# Altium PCB CarrierBoard.PcbDoc (part 1 of 2)
Units mil, origin at the board's own origin, x right, y up, seen from the top; angles counter-clockwise.
Board outline 3784.29 x 4050 mil, 2 copper layers (Top Layer, Bottom Layer), stack 63 mil thick; 58 components, 54 nets, 251 pads, 77 vias.
Unrouted connection lines stored in the file: 2.
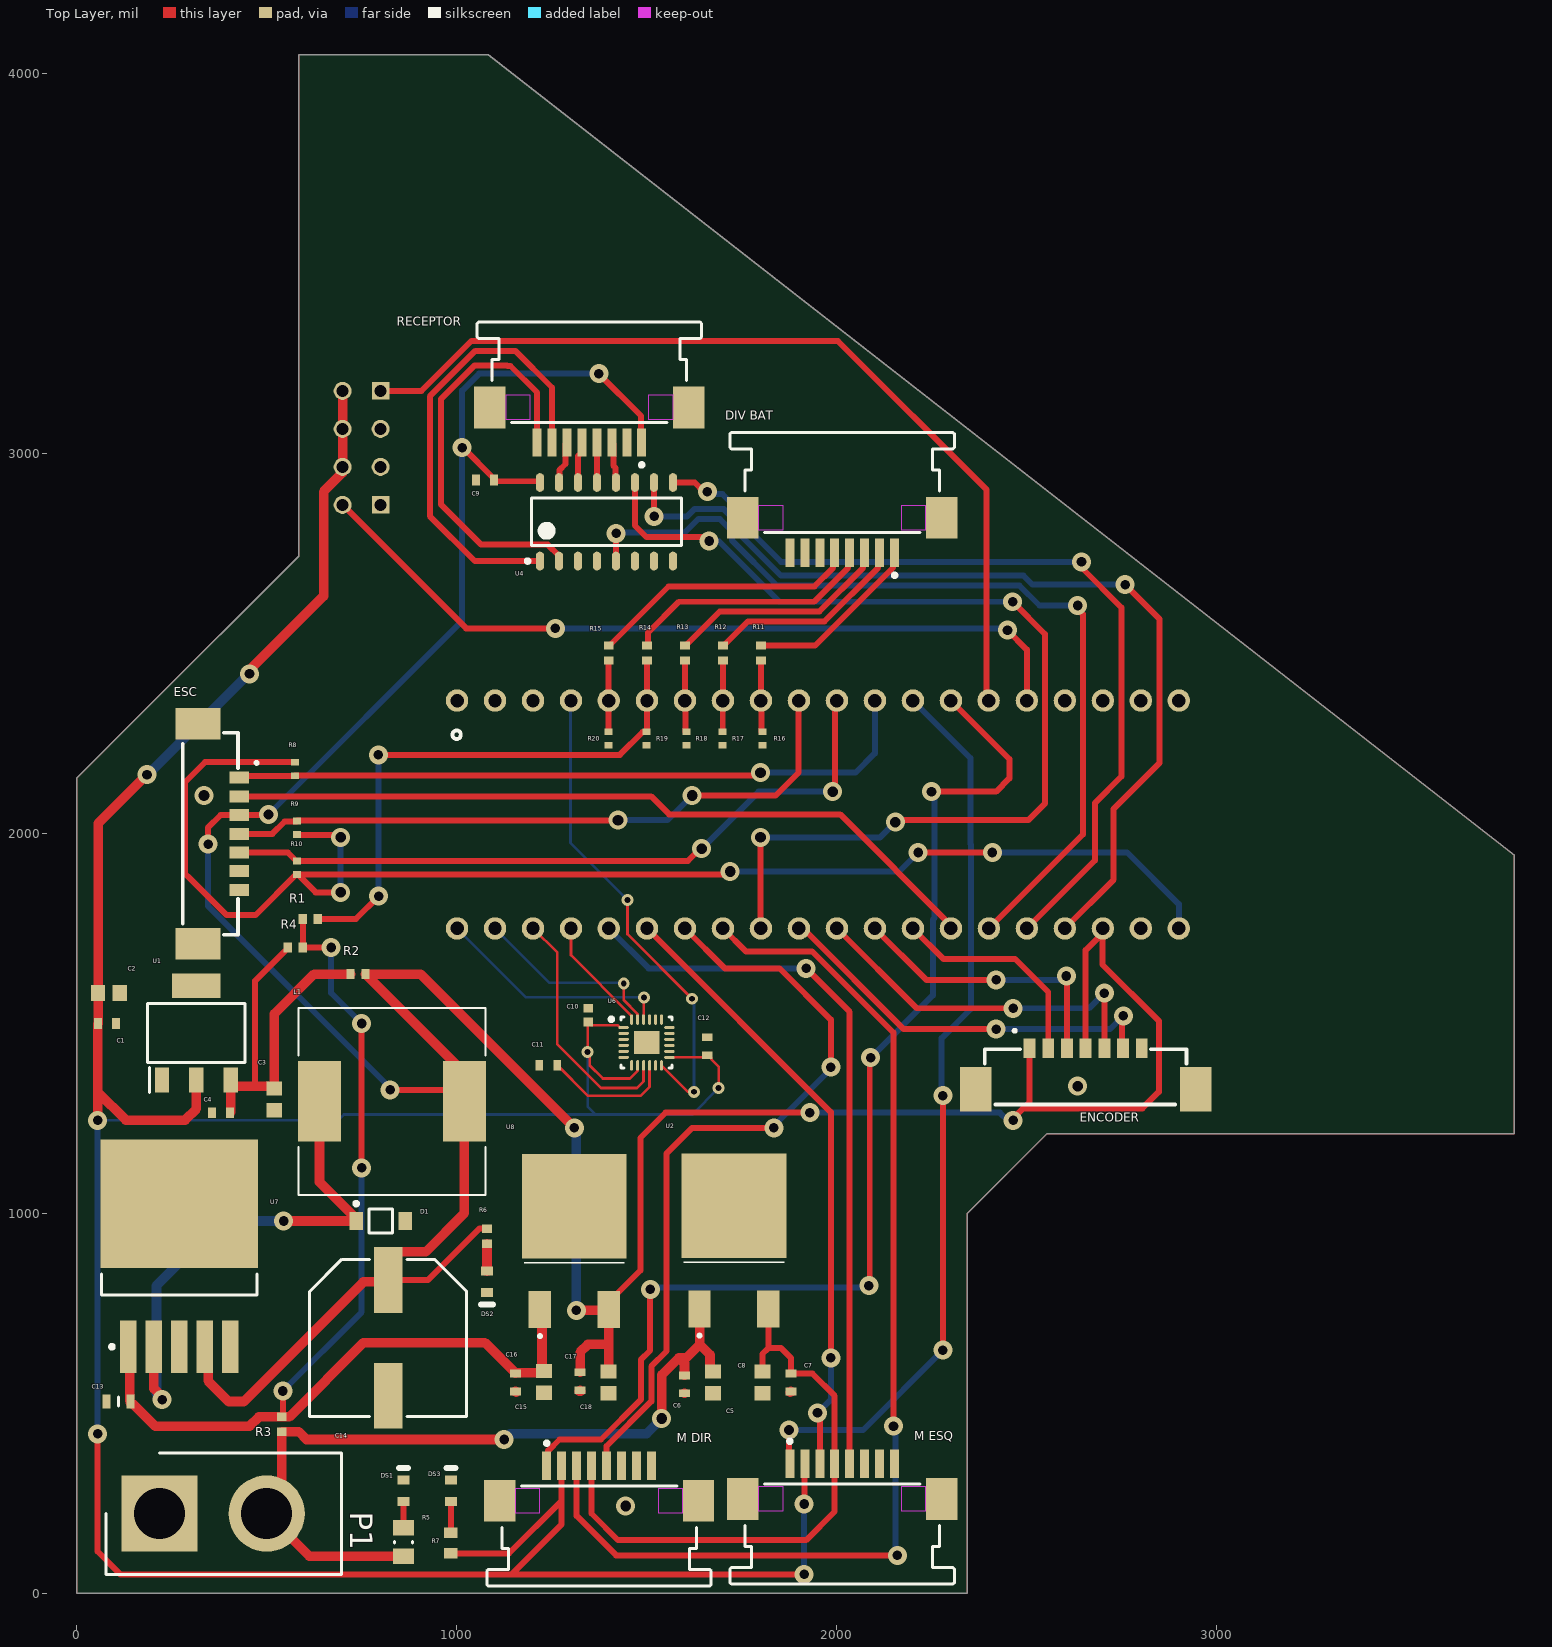
[diagram p0: Top Layer view]
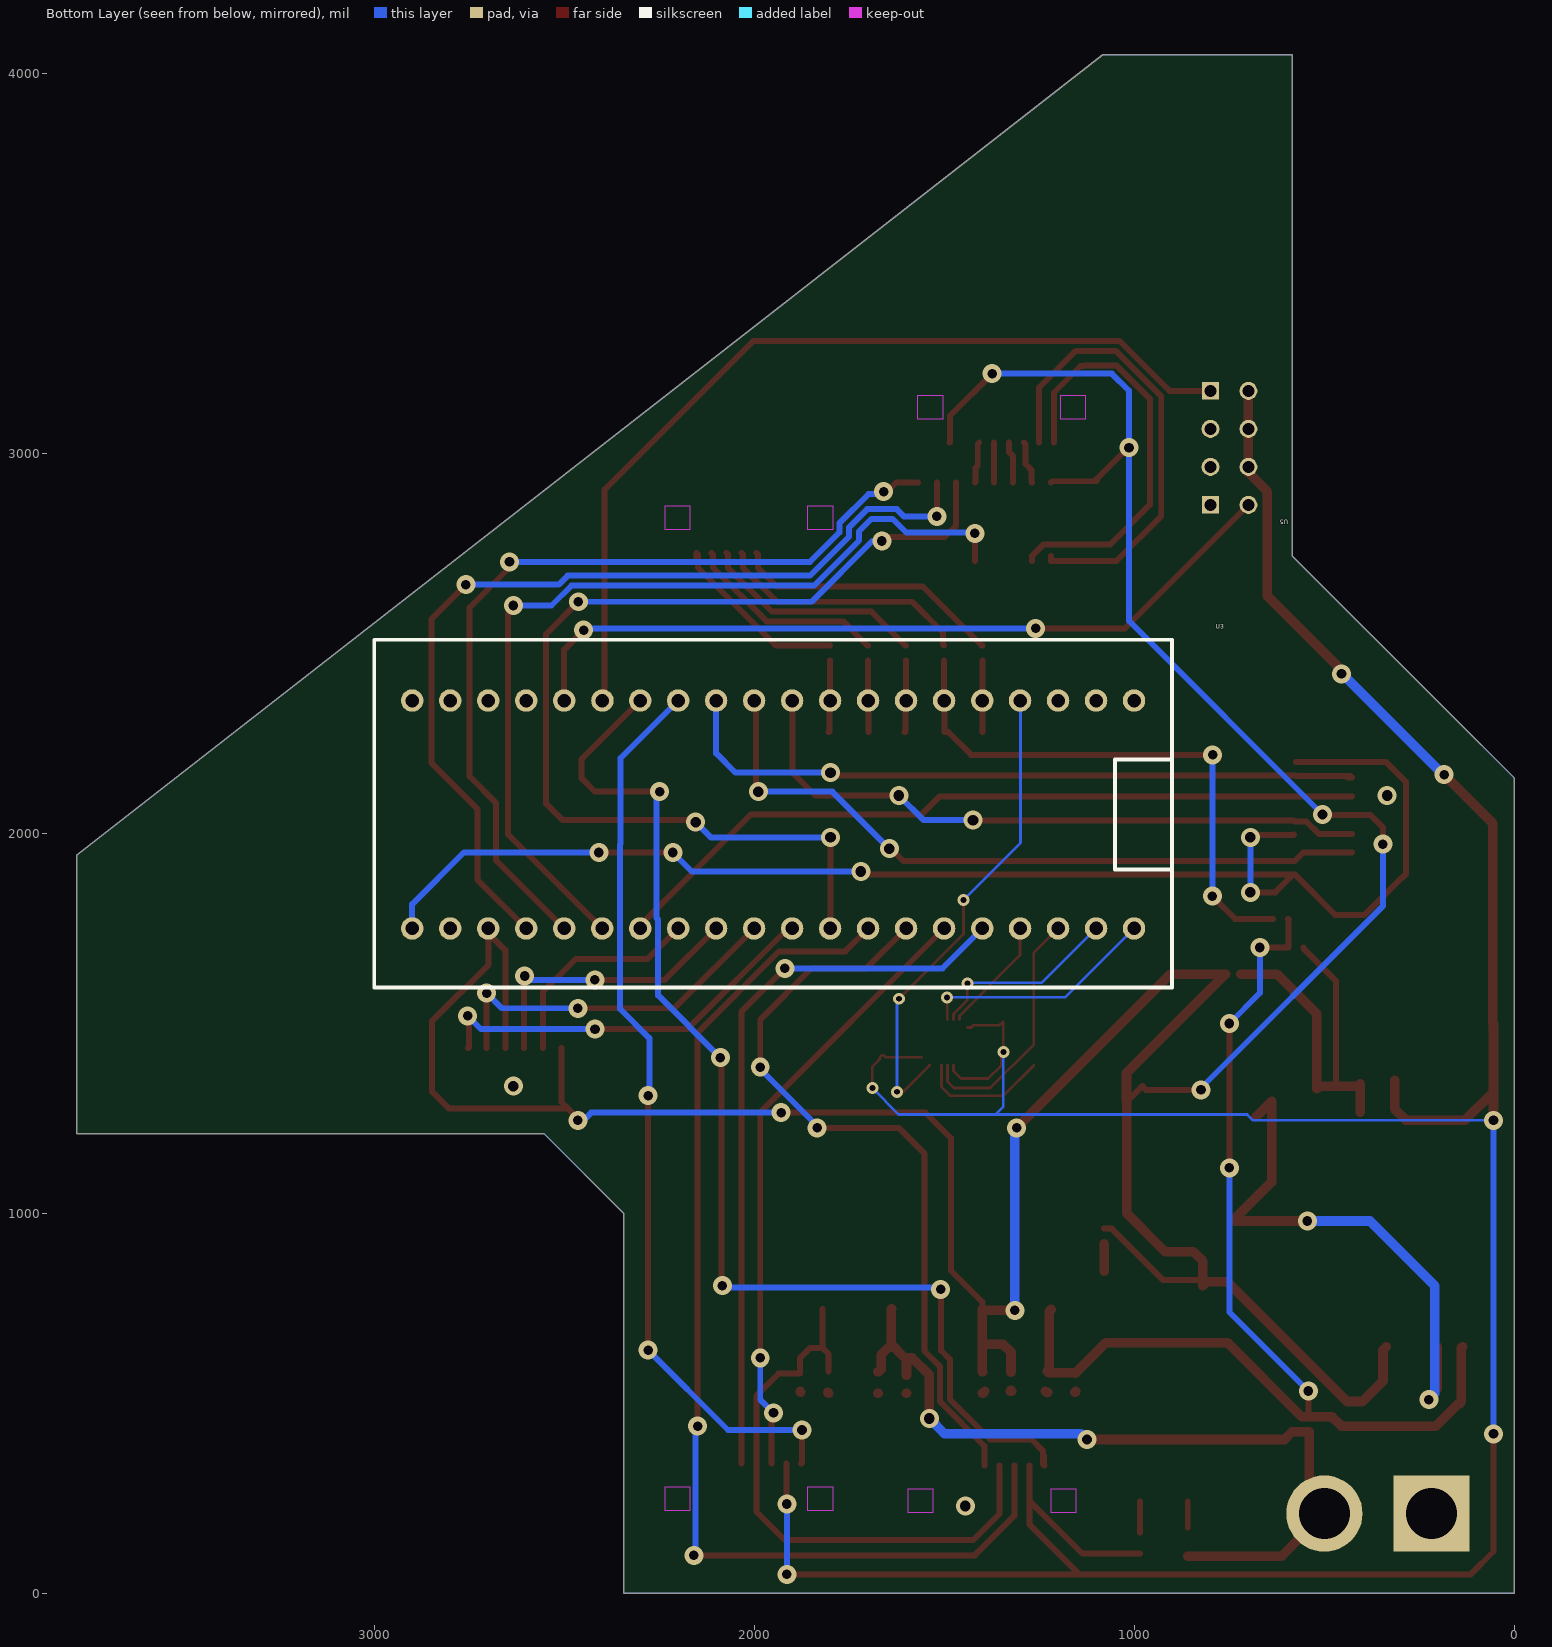
[diagram p1: Bottom Layer view, seen from below]

## Layer stack, top to bottom
Top Solder: solder mask 0.4, Solder Resist, Dk 3.5
Top Layer: signal copper 1.4
Dielectric 1: dielectric 60.2, FR-4, Dk 4.8
Bottom Layer: signal copper 1.4
Bottom Solder: solder mask 0.4, Solder Resist, Dk 3.5

## Board outline
0,2145.71 0,0 2344.29,0 2344.29,1000 2554.29,1210 3784.29,1210 3784.29,1942.6 1083.42,4050 584.29,4050 584.29,2730 169.29,2315

## Design rules (kind name [scope] priority, off if disabled: settings)
Clearance [All] p1: gap=7 ignorepadtopadclearanceinfootprint=TRUE
HoleSize [All] p1: absolutevalues=TRUE maxlimit=140 minlimit=1 maxpercent=80.000 minpercent=20.000
HoleToHoleClearance [All] p1: gap=7 allowstackedmicrovias=TRUE
MinimumSolderMaskSliver [All] p1: minsoldermaskwidth=7
PolygonConnect PolygonConnect_1 [All vs IsNamedPolygon('GND')] p1: connectstyle=Direct reliefconductorwidth=10 reliefentries=4 polygonreliefangle="90 Angle" airgapwidth=10
PolygonConnect [All] p2: connectstyle=Relief reliefconductorwidth=10 reliefentries=4 polygonreliefangle="90 Angle" airgapwidth=10
RoutingVias [All] p1: holewidth=15.74 width=31.38 viastyle="Through Hole" minholewidth=25.29 minwidth=50 maxholewidth=25.29 maxwidth=50
SilkToSolderMaskClearance [IsPad] p1: minsilkscreentomaskgap=3.3 clearancetoexposedcopper=TRUE
SolderMaskExpansion [All] p1: expansion=4
Width [All] p1: maxlimit=25.29 minlimit=7 preferedwidth=15.74
26 further rules are at their usual default settings.

## Classes and differential pairs
component class Designator: C13 C14 C15 C16 C17 C18 D1 L1 U7 U8
component class CarrierBoard: C1 C2 C3 C4 C5 C6 C7 C8 DS1 DS2 DS3 P1 R1 R2 R3 R4 R5 R6 U1 U2

## Components (designator, comment, footprint, x,y, rotation, side; value= is the part's Value field where it differs from the comment)
C1 "C1005X7R1H104K050BB" TDK-C1005-2_M 80,1500 r180 top
C2 "1uF" CAPC1608X90X35ML10T15 85,1580 r180 top
C3 "1uF" CAPC1608X90X35ML10T15 520,1300 r90 top
C4 "C1005X7R1H104K050BB" TDK-C1005-2_M 380,1265 r0 top
C5 "1uF" CAPC1608X90X35ML10T15 1675,555 r90 top
C6 "C1005X7R1H104K050BB" TDK-C1005-2_M 1600,550 r90 top
C7 "C1005X7R1H104K050BB" TDK-C1005-2_M 1880,555 r90 top
C8 "1uF" CAPC1608X90X35ML10T15 1805,555 r90 top
C9 "C1005X7R1H104K050BB" TDK-C1005-2_M 1074.51,2930.49 r0 top
C10 "10n" CAPC1005X55N 1346.46,1521.89 r90 top
C11 "C1005X7R1H104K050BB" TDK-C1005-2_M 1241.38,1390 r0 top
C12 "C1005X7R1H104K050BB" TDK-C1005-2_M 1660,1440 r270 top
C13 "C1608X5R1V335K080AC" CAPC1608X80N 110,505 r0 top
C14 "EEE-FK1H221P" PNSC-EEE-1HA221P_L 820,672.56 r270 top
C15 "1uF" CAPC1608X90X35ML10T15 1230,556.46 r90 top
C16 "C1005X7R1H104K050BB" TDK-C1005-2_M 1155,555 r90 top
C17 "C1005X7R1H104K050BB" TDK-C1005-2_M 1325,558.39 r90 top
C18 "1uF" CAPC1608X90X35ML10T15 1400,555 r90 top
D1 "MBR0540T1G" ONSC-SOD-123-2-425-04_V 800,980 r0 top
"DIV BAT" "52271-0879" MOLX-52271-0879 2015,2785 r180 top (schematic designator J6)
DS1 "TLMB1100-GS08" VISH-TLMX1100-2_V 860,270 r90 top
DS2 "TLMS1100-GS08" VISH-TLMX1100_V 1080,820 r270 top
DS3 "TLMY1100-GS08" VISH-TLMX1100-2_V 985,270 r90 top
ENCODER "53398-0771" 53398-0771 2390.04,1432.31 r0 top
ESC "53398-0771" 53398-0771 425,2265 r270 top
L1 "SRR1260-101M" *INDP125125X600N 830,1295 r0 top
"M DIR" "52271-0879" MOLX-52271-0879 1375,290 r0 top (schematic designator J7)
"M ESQ" "52271-0879" MOLX-52271-0879 2015,295 r0 top (schematic designator J8)
P1 "VBAT5S" SHDR2W320P716_1X2_1574X813X1588P 217.99,210 r0 top
R1 "Jumper" RESC0402(1005)_N 615,1775 r180 top value="0.00 Ohm"
R2 "Jumper" RESC0402(1005)_N 740.32,1630 r180 top value="0.00 Ohm"
R3 "Jumper" RESC0402(1005)_N 540,445 r90 top value="0.00 Ohm"
R4 "Jumper" RESC0402(1005)_N 575.32,1700 r180 top value="0.00 Ohm"
R5 "1K" RESC0805(2012)_N 860,135 r270 top value="1000.00 Ohm"
R6 "270R" RESC0402(1005)_N 1080,940 r90 top value="270.00 Ohm"
R7 "220R" RESC1608X55X25NL10T15 985,132.44 r270 top
R8 "10K" RESC0402(1005)_L 575,2170 r90 top value="10000.00 Ohm"
R9 "10K" RESC0402(1005)_L 580,2015 r90 top value="10000.00 Ohm"
R10 "10K" RESC0402(1005)_L 580,1910 r270 top value="10000.00 Ohm"
R11 "56K" RESC0402(1005)_N 1801.15,2475 r90 top value="56000.00 Ohm"
R12 "56K" RESC0402(1005)_N 1701.15,2475 r90 top value="56000.00 Ohm"
R13 "56K" RESC0402(1005)_N 1601.15,2475 r90 top value="56000.00 Ohm"
R14 "56K" RESC0402(1005)_N 1501.15,2475 r90 top value="56000.00 Ohm"
R15 "56K" RESC0402(1005)_N 1400.36,2475 r90 top value="56000.00 Ohm"
R16 "10K" RESC0402(1005)_L 1805,2250 r90 top value="10000.00 Ohm"
R17 "10K" RESC0402(1005)_L 1700,2250 r90 top value="10000.00 Ohm"
R18 "10K" RESC0402(1005)_L 1605,2250 r90 top value="10000.00 Ohm"
R19 "10K" RESC0402(1005)_L 1500,2250 r90 top value="10000.00 Ohm"
R20 "10K" RESC0402(1005)_L 1400,2250 r90 top value="10000.00 Ohm"
RECEPTOR "52271-0879" MOLX-52271-0879 1349.51,3075.49 r180 top (schematic designator J5)
U1 "LD1117S33CTR" SOT230P700X190-4N 315,1475 r90 top
U2 "AS7815ADTR-G1" ZLDO1117K50TC 1730,894.8 r0 top
U3 "Blue Pill" "blue pill" 761.15,2498.57 r0 bottom
U4 "SN74LS151DR" D0016A_L 1394.51,2820.49 r90 top
U5 "ESP8266 Wifi module 01" ESP01 636.95,3300.59 r0 bottom
U6 "MPU-9250" INSE-QFN-24-1700X1540TP_L 1500,1450 r0 top
U7 "LM2596SX-5.0/NOPB" TS5B_M 270,887.21 r90 top
U8 "AS7805ADTR-G1" ZLDO1117K50TC 1310,893.62 r0 top

## Footprints (in the part's own frame and the unit in brackets; to place one, negate y for a bottom-side part, rotate by r counter-clockwise, add the part's x,y. Pads: shape width x height; smd on the part's side, far side on the other; paste and mask are expansions set on the pad)
53398-0771 [mm]
  rect 0.8x1.3 smd: 1(3,0.068) 2(4.25,0.068) 3(5.5,0.068) 4(6.75,0.068) 5(8,0.068) 6(9.25,0.068) 7(10.5,0.068)
  rect 2.1x3 smd: 8(-0.6,-2.682) 9(14.1,-2.682)
  silkscreen extent 0,-3.7 13.5,1.3
*INDP125125X600N [mm]
  rect 2.9x5.4 smd: 1(-4.85,0) 2(4.85,0)
  silkscreen extent -6.25,-6.25 6.25,6.25
"blue pill" [mm]
  round 1.5 hole 0.9: 1(6.096,3.774) 2(8.636,3.774) 3(11.176,3.774) 4(13.716,3.774) 5(16.236,3.774) 6(18.796,3.774) 7(21.336,3.774) 8(23.876,3.774) 9(26.416,3.774) 10(28.956,3.774) 11(31.496,3.774) 12(34.036,3.774) 13(36.576,3.774) 14(39.116,3.774) 15(41.636,3.774) 16(44.196,3.774) 17,(46.736,3.774) 18(49.276,3.774) 19(51.816,3.774) 20(54.356,3.774) 21(54.356,19.014) 22(51.816,19.014) 23(49.276,19.014) 24(46.736,19.014) 25(44.196,19.014) 26(41.656,19.014) 27(39.116,19.014) 28(36.576,19.014) 29(34.036,19.014) 30(31.496,19.014) 31(28.956,19.014) 32(26.416,19.014) 33(23.876,19.014) 34(21.336,19.014) 35(18.796,19.014) 36(16.236,19.014) 37(13.716,19.014) 38(11.176,19.014) 39(8.636,19.014) 40(6.096,19.014)
  silkscreen extent 3.56,-0.29 56.9,22.95, body extent 0.1,-0.04 57.66,22.82, height 9.77
CAPC1005X55N [mm]
  rect 0.6x0.62 smd: 1(-0.46,0) 2(0.46,0)
  body extent -0.5,-0.25 0.5,0.25, height 0.55
CAPC1608X80N [mm]
  rect 0.54x0.94 smd: 1(-0.8,0) 2(0.8,0)
  silkscreen extent 0,-0.3 0,0.3, body extent -0.8,-0.4 0.8,0.4, height 0.8
CAPC1608X90X35ML10T15 [mm] "Chip Capacitor, 2-Leads, Body 1.60x0.80mm, IPC Low Density"
  rect 0.95x1.05 smd: 1(-0.725,0) 2(0.725,0)
  body extent -0.85,-0.45 0.85,0.45, height 0.9
D0016A_L [mm] "SOIC, 16-Leads, Body 10x4mm, Pitch 1.27mm, IPC High Density"
  oval 1.25x0.55 smd: 1(-2.625,4.445) 2(-2.625,3.175) 3(-2.625,1.905) 4(-2.625,0.635) 5(-2.625,-0.635) 6(-2.625,-1.905) 7(-2.625,-3.175) 8(-2.625,-4.445) 9(2.625,-4.445) 10(2.625,-3.175) 11(2.625,-1.905) 12(2.625,-0.635) 13(2.625,0.635) 14(2.625,1.905) 15(2.625,3.175) 16(2.625,4.445)
  silkscreen extent -2.75,-5 1.6,5.39, body extent -3,-4.95 3,4.95, height 1.59
ESP01 [mil]
  round 47.25 / inner round 60 / far side round 47.25 hole 31.5: CH_PD(63.05,335.59) GPIO0(163.05,235.59) GPIO2(163.05,335.59) RST(63.05,235.59) TX(63.05,435.59) VCC(63.05,135.59)
  rect 45.75x45.75 / inner rect 60x60 / far side rect 45.75x45.75 hole 31.5: GND(163.05,435.59) RX(163.05,135.59)
  body extent 3,0 987,570, height 137
INSE-QFN-24-1700X1540TP_L [mm] "QFN, 24-Leads, Body 3.1x3.1mm, Pitch 0.40mm, Thermal Pad 1.54x1.70mm, IPC High Density"
  oval 0.7x0.2 smd: 1(-1.532,1) 2(-1.532,0.6) 3(-1.532,0.2) 4(-1.532,-0.2) 5(-1.532,-0.6) 6(-1.532,-1) 13(1.532,-1) 14(1.532,-0.6) 15(1.532,-0.2) 16(1.532,0.2) 17(1.532,0.6) 18(1.532,1)
  oval 0.2x0.7 smd: 7(-1,-1.532) 8(-0.6,-1.532) 9(-0.2,-1.532) 10(0.2,-1.532) 11(0.6,-1.532) 12(1,-1.532) 19(1,1.532) 20(0.6,1.532) 21(0.2,1.532) 22(-0.2,1.532) 23(-0.6,1.532) 24(-1,1.532)
  rect 1.7x1.54 smd: 25(0,0)
  silkscreen extent -2.47,-1.7 1.7,1.7, body extent -1.55,-1.55 1.55,1.55, height 1.05
MOLX-52271-0879 [mm] "FPC Connector, 8-Leads, Right Angle, Pitch 1.0 mm, Mated Height 3.0 mm, SMT"
  rect 0.6x1.9 smd: 1(-3.5,1.175) 2(-2.5,1.175) 3(-1.5,1.175) 4(-0.5,1.175) 5(0.5,1.175) 6(1.5,1.175) 7(2.5,1.175) 8(3.5,1.175)
  rect 2.1x2.8 smd: MP1(-6.65,-1.175) MP2(6.65,-1.175)
  Keep-Out Layer region: -5.6,-1.975 -3.95,-1.975 -3.95,-0.375 -5.6,-0.375
  Keep-Out Layer region: 3.95,-1.975 5.6,-1.975 5.6,-0.375 3.95,-0.375
  silkscreen extent -7.5,-6.87 7.5,2.8, body extent -7.5,-6.87 7.5,1.83, height 3.01
ONSC-SOD-123-2-425-04_V [mm] "SOD, 2-Leads, Body 2.69x1.6mm"
  rect 0.91x1.22 smd: 1(-1.635,0) 2(1.635,0)
  silkscreen extent -1.76,-0.8 0.78,1.28, body extent -1.35,-0.8 1.35,0.8, height 1.35
PNSC-EEE-1HA221P_L [mm] "Aluminum Electrolytic Capacitor, 2-Leads, Body 10.5x10.5mm, IPC High Density"
  rect 4.4x1.9 smd: 1(-3.875,0) 2(3.875,0)
  silkscreen extent -5.25,-5.25 5.25,5.25, body extent -5.36,-5.25 5.36,5.25, height 10.5
RESC0402(1005)_L [mm] "Chip Resistor, Body 1.0x0.5mm, IPC High Density"
  rect 0.45x0.55 smd: 1(-0.45,0) 2(0.45,0)
  body extent -0.52,-0.27 0.53,0.28, height 0.4
RESC0402(1005)_N [mm] "Chip Resistor, Body 1.0x0.5mm, IPC Medium Density"
  rect 0.55x0.65 smd: 1(-0.5,0) 2(0.5,0)
  body extent -0.52,-0.27 0.53,0.28, height 0.4
RESC0805(2012)_N [mm] "Chip Resistor, Body 2.0x1.3mm, IPC Medium Density"
  rect 1.05x1.4 smd: 1(-0.95,0) 2(0.95,0)
  silkscreen extent -0.05,-0.6 0.05,0.6, body extent -1.1,-0.67 1.1,0.68, height 0.7
RESC1608X55X25NL10T15 [mm] "Chip Resistor, 2-Leads, Body 1.60x0.80mm, IPC Medium Density"
  rect 0.7x0.9 smd: 1(-0.7,0) 2(0.7,0)
  body extent -0.85,-0.45 0.85,0.45, height 0.55
SHDR2W320P716_1X2_1574X813X1588P [mm]
  rect 5.1x5.1 hole 3.4: 1(0,0)
  round 5.1 hole 3.4: 2(7.163,0)
  silkscreen extent -3.58,-4.06 12.15,4.06
SOT230P700X190-4N [mm]
  rect 1.65x0.95 smd: 1(-3.15,2.3) 2(-3.15,0) 3(-3.15,-2.3)
  rect 1.65x3.25 smd: 4(3.15,0)
  silkscreen extent -3.98,-3.25 1.97,3.25
TDK-C1005-2_M [mm] "Chip Capacitor, 2-Leads, Body 1.05x0.55mm, IPC Low Density"
  rect 0.52x0.72 smd: 1(-0.6,0) 2(0.6,0)
  body extent -0.52,-0.28 0.53,0.27, height 0.55
TS5B_M [mm] "D2-PAK, 6-Leads, Body 8.6x10.2mm, Pitch 1.7mm, Lead Span 14.1mm, IPC Low Density"
  rect 3.5x1.1 smd: 1(-6.05,3.4) 2(-6.05,1.7) 3(-6.05,0) 4(-6.05,-1.7) 5(-6.05,-3.4)
  rect 8.6x10.5 smd: 6(3.5,0)
  silkscreen extent -6.17,-5.2 -1.2,5.2, body extent -2.6,-5.2 6.29,5.2, height 4.65
VISH-TLMX1100-2_V [mm] "SMD, 2-Leads, Body 1.6x0.8mm"
  rect 0.6x0.8 smd: 1(-0.725,0) 2(0.725,0)
  silkscreen extent 1.53,-0.3 1.53,0.3, body extent -0.8,-0.4 0.8,0.4, height 0.65
VISH-TLMX1100_V [mm] "SMD, 2-Leads, Body 1.6x0.8mm"
  rect 0.6x0.8 smd: 1(-0.725,0) 2(0.725,0)
  silkscreen extent 1.53,-0.4 1.53,0.4, body extent -0.8,-0.4 0.8,0.4, height 0.65
ZLDO1117K50TC [mm]
  rect 1.5x2.5 smd: 1(-2.3,-3.72) 3(2.3,-3.72)
  rect 7x7 smd: 2(0,3.18)
  silkscreen extent -3.35,-5.6 3.35,-0.6

## Part data
C1 C4 C6 C7 C9 C11 C12 C16 C17: library part CMP-2000-05393-1, "Chip Capacitor, 0.1 uF, +/- 10%, 50 V, -55 to 125 degC, 0402(1005 Metric), RoHS, Tape and Reel", Capacitance=0.1µF, Manufacturer=TDK, Operating Temperature=-55degC~125degC, Package / Case=0402(1005Metric), PCN Part Number=MLCCPartNumberChange30/Nov/2012, Ratings=-, Standard Package=1, Temperature Coefficient=X7R, Tolerance=±10%, Voltage - Rated=50V, Applications=GeneralPurpose, Category=Capacitors, Datasheet URL=http://www.farnell.com/datasheets/1913358.pdf, Datasheet Version=Mar-15, Family=CeramicCapacitors, Features=-, Height - Seated (Max)=-, Kits=445-9021-KIT-ND-KITMLCC100PF-10UF04026.3-50V445-9003-KIT-ND-KITCAPCERHICAPMLCCSMD, Lead Spacing=-, Lead Style=-, Manufacturer URL=http://www.tdk.com/, Mounting Type=SurfaceMount,MLCC, Online Catalog=CSeries,GeneralPurpose, Other Names=445-5932-1, Packaging=CutTape(CT), Product Training Modules=CSeriesGeneralApplicationsSEAT,CCV,andTVCLDesignToolsGuidetoReplacinganElectrolyticCapacitorwithanMLCC, RoHS Information=RoHSCertificate-MLCC, Series=C
C2 C3 C5 C8 C15 C18: library part CMP-2006-02823-1, "MURATA   GRM188R61H105KAALD   Multilayer Ceramic Capacitor, GRM Series, 1 F,  10%, X5R, 50 V, 0603 [1608 Metric]", Case/Package=0603, Case Code (Metric)=1608, Dielectric=X7R, Manufacturer=Murata, Manufacturer Part Number=GRM188R61H105KAALD, Max Operating Temperature=85°C, Min Operating Temperature=-55°C, Package Quantity=4000, Supplier Part Number 1=81-GRM188R61H105KALD, Tolerance=10%, Voltage=50V, Capacitance=1uF, Case Code (Imperial)=0603, ComponentLink1Description=http://www.farnell.com/datasheets/2048611.pdf?src-supplier=Newark, ComponentLink1URL=http://www.farnell.com/datasheets/2048611.pdf?src-supplier=Newark, ComponentLink2Description=http://www.farnell.com/datasheets/1747450.pdf?src-supplier=Element14, ComponentLink2URL=http://www.farnell.com/datasheets/1747450.pdf?src-supplier=Element14, ComponentLink3Description=https://www.distrelec.biz/Web/Downloads/_t/ds/murata_MLCC_eng_tds.pdf?mime=application%2Fpdf&src-supplier=Distrelec, ComponentLink3URL=https://www.distrelec.biz/Web/Downloads/_t/ds/murata_MLCC_eng_tds.pdf?mime=application%2Fpdf&src-supplier=Distrelec, Composition=Ceramic, Datasheet=https://br.mouser.com/datasheet/2/281/murata_03052018_GRM_Series_1-1310166.pdf, Depth=0.8mm, Height=0.8mm, Lead Free="Lead Free", Length=1.6mm, Material=Ceramic, Mount="Surface Mount", Packaging="Tape and Reel", Part Number=GRM188R61H105KAALD, Radiation Hardening=No, REACH SVHC="No SVHC", Stock 1=0, Supplier 1=Mouser, Termination=SMD/SMT, Thickness=0.035inch, Voltage Rating=50V, Voltage Rating (DC)=50V, Weight=0.000222oz, Width=0.8mm
C10: library part GRM155R71E103JA01J, "Capacitor", Manufacturer_Name="Murata Electronics", Mouser Part Number=81-GRM155R71E103JA1J, Datasheet Link=http://www.murata.com/~/media/webrenewal/support/library/catalog/products/capacitor/mlcc/c02e.pdf, Height=0.55mm, Manufacturer_Part_Number=GRM155R71E103JA01J, Mouser Price/Stock=https://www.mouser.com/Search/Refine.aspx?Keyword=81-GRM155R71E103JA1J
C13: "Capacitor 3.3uF", Capacitance=3.3uF, Case/Package=0603, Case Code (Metric)=1608, Dielectric=X5R, Dielectric Material=Ceramic, Manufacturer=TDK, Max Operating Temperature=85°C, Min Operating Temperature=-55°C, Mouser Part Number=810-C1608X5R1V335KAC, Package Quantity=4000, Supplier Part Number 1=445-14167-1-ND, Tolerance=10%, Voltage Rating=35V, Case Code (Imperial)=0603, ComponentLink1Description=https://datasheet.ciiva.com/14909/tdkmlcccaprange-14909925.pdf?src-supplier=Digi-Key, ComponentLink1URL=https://datasheet.ciiva.com/14909/tdkmlcccaprange-14909925.pdf?src-supplier=Digi-Key, ComponentLink2Description=https://datasheet.ciiva.com/14909/tdkmlcccaprange-14909926.pdf?src-supplier=Digi-Key, ComponentLink2URL=https://datasheet.ciiva.com/14909/tdkmlcccaprange-14909926.pdf?src-supplier=Digi-Key, Datasheet Link=https://product.tdk.com/info/en/catalog/datasheets/mlcc_commercial_midvoltage_en.pdf, Height=0.8mm, Lead Free="Lead Free", Length=0.063inch, Manufacturer_Name=TDK, Manufacturer_Part_Number=C1608X5R1V335K080AC, Manufacturer Part Number=C1608X5R1V335K080AC, Mount="Surface Mount", Mouser Price/Stock=https://www.mouser.com/Search/Refine.aspx?Keyword=810-C1608X5R1V335KAC, Packaging="Tape and Reel", Pricing 1="1 = 0,45000, 10 = 0,31100, 100 = 0,18630, 500 = 0,13972, 1000 = 0,11799 (USD)", RoHS=Yes, Stock 1=4798, Supplier 1=Digi-Key, Termination=SMD/SMT, Thickness=0.035inch, Voltage Rating (DC)=35V, Weight=7.1E-05oz, Width=0.8mm
C14: library part CMP-2000-06200-1, "Aluminum Electrolytic Capacitor, 220 uF, +/- 20%, 50 V, -40 to 85 degC, 2-Pin SMD, RoHS, Tape and Reelhttps://br.mouser.com/ProductDetail/Panasonic/EEE-FK1H221P?qs=%2Fha2pyFaduioJWBrqH8qNcijPCQSw77%252BpLytlHuDdeup2lEE5e2lgA%3D%3D", AE Capacitor Case=RadialCan-SMD, Capacitance=220µF, Capacitance Tolerance=±20%, Life Time @ Temperature=2000hours@85°C, Manufacturer=Panasonic, Operating Temperature Max=85°C, Operating Temperature Min=-40°C, Package Description="2-Pin Surface Mount Device, Body 10.3 x 10.3 mm", Package Reference=SMD, Ripple Current AC=300mA, Voltage Rating=50V, Capacitance Tolerance ±=±20%, Capacitor Case Style=RadialCan-SMD, Datasheet URL=https://br.mouser.com/datasheet/2/315/ABA0000C1181-947564.pdf, Datasheet Version=11/2012, Diameter=10mm, Height=10.2mm, Lifetime @ Temperature=2000hours@85°C, Manufacturer URL=http://www.panasonic.com/, Mounting Technology=SurfaceMount, Packaging=CutTape, Product Range=PANASONIC-SSeries, SVHC=ToBeAdvised
D1: library part CMP-1055-00401-1, "Schottky Power Rectifier, 2-Pin SOD-123, Pb-Free, Tape and Reel", Manufacturer="On Semiconductor", ComponentLink1Description="Manufacturer URL", ComponentLink1URL=http://www.onsemi.com/, ComponentLink2Description=Datasheet, ComponentLink2URL=http://www.onsemi.cn/pub_link/Collateral/MBR0540T1-D.PDF, ComponentLink3Description="Package Specification", ComponentLink3URL=http://www.onsemi.com/pub_link/Collateral/425-04.PDF, Configuration=Single, Datasheet=https://br.mouser.com/datasheet/2/315/ABA0000C1181-947564.pdf, DatasheetVersion="Rev. 7", IFSM Max (A)=5.5, Mounting Technology="Surface Mount", PackageDescription="2-Pin SOD, Body 1.6 x 2.69 mm", PackageReference=SOD-123-2-425-04, PackageVersion="Rev. G, 10/2009", Packing="Tape and Reel", PartNumber=MBR0540T1G, RoHS=TRUE
"DIV BAT" "M DIR" "M ESQ" RECEPTOR: library part CMP-1241-00231-1, "1.0 mm Pitch Easy-On(TM) Type FPC Connector, 3.0 mm Mated Height, Right Angle, ZIF, SMT, Bottom Contact, 8 Circuits, -40 to 85 degC, ELV and RoHS Compliant, Tape and Reel", Current (Max per Contact)=0.5A, Manufacturer=Molex, Voltage (Max)="50V AC (RMS)/DC", Circuits (Loaded)=8, ComponentLink1Description="Manufacturer URL", ComponentLink1URL=http://www.molex.com/molex/index.jsp, ComponentLink2Description=Datasheet, ComponentLink2URL=http://www.molex.com/webdocs/datasheets/pdf/en-us/0522710879_FFC_FPC_CONNECTORS.pdf, ComponentLink3Description="Package Specification", ComponentLink3URL=http://www.molex.com/pdm_docs/sd/522710879_sd.pdf, Contact Position=Bottom, Durability (mating cycles max)=30, Entry Angle="90degrees Angle", Mated Height=3.00mm, Material - Metal="Phosphor Bronze", Material - Plating Mating=Tin-Bismuth, Material - Plating Termination=Tin-Bismuth, Mounting Technology="Surface Mount", Number of Rows=1, Orientation="Right Angle", PackageDescription="8-Lead FPC Connector, Pitch 1.0 mm", PackageReference=52271-0879, PackageVersion="Rev. B, 04/2004", Packing="Tape and Reel", PartNumber=52271-0879, PCB Locator=No, PCB Retention=Yes, Pitch - Mating Interface=1.00mm, Pitch - Termination Interface=1.00mm, Polarized to PCB=Yes, RoHS=TRUE, Stackable=No
DS1: library part CMP-1666-00028-1, "Blue LED, 10 mA, 3.9 V, -40 to 100 degC, 2-Pin SMD (0603), RoHS, Tape and Reel                  TLMB1100-GS08", Capacitance="10 nF", Case\Package=Radial, Max Operating Temperature="125 degC", Min Operating Temperature="-55 degC", Package Quantity=500, Tolerance=10%, Type (Capacitors)=X7R, Voltage Rating="100 V", ComponentLink1Description="Manufacturer URL", ComponentLink1URL=http://www.vishay.com/, ComponentLink2Description=Datasheet, ComponentLink2URL=http://download.siliconexpert.com/pdfs/2016/8/7/12/43/26/667/vsh_/manual/379263299541529tlmb1100.pdf, DatasheetVersion="Rev. 2.7, 03/2016", Height="2.54 mm", Lead Pitch="2.54 mm", Length="5.33 mm", Mount="Through Hole", PackageDescription="2-Pin Surface Mount Device, Body 1.6 x 0.8 mm", PackageReference=0603, Packaging=Bulk, Pins=2, Radiation Hardening=No, REACH SVHC="No SVHC", RoHSCompliant=true, Width="3.81 mm"
DS2: library part CMP-1666-00027-1, "LED, RED, 2.1 V, -40 to 100 degC, 2-Pin SMD (0603), RoHS, Tape and Reel", Capacitance="12 pF", Case/Package=0603, Case Code (Metric)=1608, Max Operating Temperature=125degC, Min Operating Temperature=-55degC, Package Quantity=4000, Resistance="100000000000 Ohm", Tolerance=5%, Type (Capacitors)=C0G, Voltage Rating="50 V", Case Code (Imperial)=0603, ComponentLink1Description="Manufacturer URL", ComponentLink1URL=http://www.vishay.com/, ComponentLink2Description=Datasheet, ComponentLink2URL=http://www.vishay.com/docs/83173/tlmb1100.pdf, DatasheetVersion="Rev. 2.7, 03/2016", Height="0.8 mm", Length="1.6 mm", Mount="Surface Mount", PackageDescription="2-Pin Surface Mount Device, Body 1.6 x 0.8 mm", PackageReference=TLMX1100, Packaging="Tape and Reel", Pins=2, Radiation Hardening=No, REACH SVHC="No SVHC", RoHSCompliant=True, Voltage Rating (DC)="50 V", Width="0.8 mm"
DS3: library part CMP-1666-00030-1, "Yellow LED, 20 mA, 2.1 V, -40 to 100 degC, 2-Pin SMD (0603), RoHS, Tape and Reel             TLMY1100-GS08", ComponentLink1Description="Manufacturer URL", ComponentLink1URL=http://www.vishay.com/, ComponentLink2Description=Datasheet, ComponentLink2URL=http://download.siliconexpert.com/pdfs/2016/8/7/12/43/26/667/vsh_/manual/379263299541529tlmb1100.pdf, DatasheetVersion="Rev. 2.7, 03/2016", PackageDescription="2-Pin Surface Mount Device, Body 1.6 x 0.8 mm", PackageReference=0603
ENCODER ESC: "7 way SMT straight header Molex PICOBLADE Series, Series Number 53398, 1.25mm Pitch 7 Way 1 Row Straight PCB Header, Solder Termination, 1A", Manufacturer_Name=Molex, RS Part Number=5427220P, Allied_Number=70373150, Allied Price/Stock=http://www.alliedelec.com/molex-incorporated-53398-0771/70373150/, Arrow Part Number=53398-0771, Arrow Price/Stock=http://uk.rs-online.com/web/p/products/5427220P, Datasheet Link=http://www.molex.com/webdocs/datasheets/pdf/en-us/0533980771_PCB_HEADERS.pdf, Manufacturer_Part_Number=53398-0771, RS Price/Stock=http://uk.rs-online.com/web/p/products/5427220P
L1: library part SRR1260-220M, "FIXED IND 100UH 1.7A 180 MOHM", Case/Package=1260, Current Rating=1.7A, DC Resistance (DCR)=180mR, Frequency=6.07MHz, Inductance=100uH, Inductance Tolerance=20%, Manufacturer=Bourns, Max Operating Temperature=125°C, Min Operating Temperature=-40°C, Mouser Part Number=652-SRR1260-220M, Package Quantity=600, Resistance=180MR, RS Part Number=7272246P, Supplier Part Number 1=652-SRR1260-101M, Test Frequency=100kHz, Allied_Number=70277063, Allied Price/Stock=https://www.alliedelec.com/bourns-srr1260-220m/70277063/, ComponentLink1Description=http://www.bourns.com/docs/Product-Datasheets/SRR1260.pdf?src-supplier=Digi-Key, ComponentLink1URL=http://www.bourns.com/docs/Product-Datasheets/SRR1260.pdf?src-supplier=Digi-Key, ComponentLink2Description=http://uk.rs-online.com/webdocs/0def/0900766b80defded.pdf?src-supplier=RSComponents, ComponentLink2URL=http://uk.rs-online.com/webdocs/0def/0900766b80defded.pdf?src-supplier=RSComponents, ComponentLink3Description=http://www.farnell.com/datasheets/1430852.pdf?src-supplier=Element14, ComponentLink3URL=http://www.farnell.com/datasheets/1430852.pdf?src-supplier=Element14, ComponentLink4Description=http://www.farnell.com/datasheets/1914016.pdf?src-supplier=Element14, ComponentLink4URL=http://www.farnell.com/datasheets/1914016.pdf?src-supplier=Element14, ComponentLink5Description=http://www.bourns.com/pdfs/SRR1260.pdf?src-supplier=Avnet, ComponentLink5URL=http://www.bourns.com/pdfs/SRR1260.pdf?src-supplier=Avnet, ComponentLink6Description=http://www.farnell.com/datasheets/2366825.pdf?src-supplier=Newark, ComponentLink6URL=http://www.farnell.com/datasheets/2366825.pdf?src-supplier=Newark, ComponentLink7Description=https://www.alliedelec.com/m/d/845565468e1e76a1db638ca94afd232b.pdf?src-supplier=Allied+Electronics, ComponentLink7URL=https://www.alliedelec.com/m/d/845565468e1e76a1db638ca94afd232b.pdf?src-supplier=Allied+Electronics, Composition=Wirewound, Core Material=Ferrite, Datasheet Link=https://componentsearchengine.com/Datasheets/2/SRR1260-220M.pdf, DC Current=1.7A, Depth=12.8mm, Height=6mm, Height - Seated (Max)=0.256inch, Length=12.5mm, Manufacturer_Name=Bourns, Manufacturer_Part_Number=SRR1260-220M, Manufacturer Part Number=SRR1260-101M, Material=Steel, Max DC Current=1.7A, Military Standard=Not, Mount="Surface Mount", Mouser Price/Stock=https://www.mouser.com/Search/Refine.aspx?Keyword=652-SRR1260-220M, Number of Pins=2, Packaging="Tape and Reel", Pricing 1="1=0.97, 10=0.833, 50=0.694, 100=0.652, 1000=0.447, 10000=0.446 (USD)", Q Factor=26, REACH SVHC="No SVHC", RMS Current (Irms)=1.7A, RS Price/Stock=http://uk.rs-online.com/web/p/products/7272246P, Saturation Current=1.7A, Self Resonant Frequency=6.07MHz, Shielding=Shielded, Stock 1=6993, Supplier 1=Mouser, Termination=SMD/SMT, Tolerance=20%, Width=12.5mm
P1: library part PRT-10474, "Connector", Manufacturer_Name=SparkFun, Mouser Part Number=474-PRT-10474, Datasheet Link=http://cdn.sparkfun.com/datasheets/Prototyping/xt60.pdf, Height=15.875mm, Manufacturer_Part_Number=PRT-10474, Mouser Price/Stock=https://www.mouser.com/Search/Refine.aspx?Keyword=474-PRT-10474
R1 R2 R3 R4: library part CMP-1011-00001-1, "Jumper 0402 (1005 Metric)", Case-EIA=0402, Case-Metric=1005, Manufacturer=Vishay, Manufacturer Part Number=CRCW04020000Z0ED, Max Operating Temperature=155°C, Max Power Dissipation=63mW, Min Operating Temperature=-55°C, Package Quantity=1, Power=None, Resistance=0mR, Supplier Part Number 1=71-CRCW0402-0-E3, Temperature Coefficient=100ppm/°C, Voltage Rating=50V, Case/Package=0402, Case Code (Imperial)=0402, Case Code (Metric)=1005, ComponentLink1Description=http://www.vishay.com/docs/20035/dcrcwe3.pdf?src-supplier=Avnet+Europe, ComponentLink1URL=http://www.vishay.com/docs/20035/dcrcwe3.pdf?src-supplier=Avnet+Europe, ComponentLink2Description=http://www.vishay.com/docs/20035/dcrcwe3.pdf?src-supplier=Avnet, ComponentLink2URL=http://www.vishay.com/docs/20035/dcrcwe3.pdf?src-supplier=Avnet, ComponentLink3Description=http://www.vishay.com/docs/20035/dcrcwe3.pdf?src-supplier=Digi-Key, ComponentLink3URL=http://www.vishay.com/docs/20035/dcrcwe3.pdf?src-supplier=Digi-Key, ComponentLink4Description=http://www.farnell.com/datasheets/2111203.pdf?src-supplier=Element14, ComponentLink4URL=http://www.farnell.com/datasheets/2111203.pdf?src-supplier=Element14, ComponentLink5Description=http://www.vishay.com/docs/20035/dcrcwe3.pdf?src-supplier=Allied+Electronics, ComponentLink5URL=http://www.vishay.com/docs/20035/dcrcwe3.pdf?src-supplier=Allied+Electronics, ComponentLink6Description=https://www.distrelec.biz/Web/Downloads/a_/en/flD-CRCW-e3_data_en.pdf?mime=application%2Fpdf&src-supplier=Distrelec, ComponentLink6URL=https://www.distrelec.biz/Web/Downloads/a_/en/flD-CRCW-e3_data_en.pdf?mime=application%2Fpdf&src-supplier=Distrelec, Composition="Thick Film", Contact Plating=Tin, Depth=0.5mm, Features="Automotive AEC-Q200", Height=0.35mm, Lead Free="Lead Free", Length=1mm, Military Standard=Not, Mount="Surface Mount", Number of Terminations=2, Packaging="Tape and Reel", Power Rating=63mW, Pricing 1="1=0.1, 10=0.017, 50=0.017, 100=0.007, 1000=0.005, 10000=0.004 (USD)", Radiation Hardening=No, REACH SVHC=Unknown, Stock 1=1223713, Supplier 1=Mouser, Technology=SMT, Termination=SMD/SMT, Tolerance=None, Voltage Rating (DC)=50V, Weight=2.3E-05oz, Width=0.5mm
R5: library part CMP-1013-00074-1, "1K 0.125W 5% 0805 (2012 Metric)  SMD", Case-EIA=0805, Case-Metric=2012, Manufacturer=Yageo, Manufacturer Part Number=RC0805JR-071KL, Max Operating Temperature=155°C, Min Operating Temperature=-55°C, Power="0.125 W", Power Rating=125mW, Resistance=1kR, Supplier Part Number 1=603-RC0805JR-071KL, Temperature Coefficient=100ppm/°C, Tolerance="5 %", Voltage Rating=150V, Case/Package=0805, Case Code (Imperial)=0805, Case Code (Metric)=2012, ComponentLink1Description=http://www.farnell.com/datasheets/2167052.pdf?src-supplier=Verical, ComponentLink1URL=http://www.farnell.com/datasheets/2167052.pdf?src-supplier=Verical, ComponentLink2Description=http://www.farnell.com/datasheets/2167052.pdf?src-supplier=Mouser, ComponentLink2URL=http://www.farnell.com/datasheets/2167052.pdf?src-supplier=Mouser, ComponentLink3Description=http://www.farnell.com/datasheets/442941.pdf?src-supplier=Element14, ComponentLink3URL=http://www.farnell.com/datasheets/442941.pdf?src-supplier=Element14, ComponentLink4Description=http://www.farnell.com/datasheets/444164.pdf?src-supplier=Element14, ComponentLink4URL=http://www.farnell.com/datasheets/444164.pdf?src-supplier=Element14, Composition="Thick Film", Contact Plating=Tin,Lead,Matte, Depth=1.25mm, Lead Free="Lead Free", Length=2mm, Military Standard=Not, Packaging="Tape and Reel", Pricing 1="1=0.11, 10=0.026, 50=0.026, 100=0.009, 1000=0.007, 10000=0.004 (USD)", Radiation Hardening=No, REACH SVHC=Unknown, Stock 1=1222072, Supplier 1=Mouser, Technology=SMT, Termination=SMD/SMT
R6: library part CMP-1011-00060-1, "270R 0.063W 5% 0402 (1005 Metric)  SMD                             603-AC0402JR-07270RL", Case-EIA=0402, Case-Metric=1005, Manufacturer=Yageo, Manufacturer Part Number=AC0402JR-07270RL, Max Operating Temperature=155°C, Max Power Dissipation=63mW, Min Operating Temperature=-55°C, Power="0.063 W", Supplier Part Number 1=603-AC0402JR-07270RL, Temperature Coefficient=100ppm/°C, Tolerance="5 %", Case/Package=0402, Case Code (Imperial)=0402, Case Code (Metric)=1005, Composition="Thick Film", Features="Moisture Resistant,Automotive AEC-Q200", Height=0.015inch, Length=0.039inch, Number of Terminations=2, Packaging="Tape and Reel", Pricing 1="1=0.1, 10=0.015, 50=0.015, 100=0.005, 1000=0.004, 10000=0.004 (USD)", Resistance=270R, Stock 1=82259, Supplier 1=Mouser, Technology=SMT, Width=0.02inch
R7: library part CMP-2000-04878-1, "Res 0603 220 Ohm 5% 0.1W(1/10W) ±100ppm/C Sulfur Resistant Pad SMD Automotive T/R", Case/Package=0603, Manufacturer=Yageo, Manufacturer Part Number 1=AF0603JR-07220RL, Max Operating Temperature=155°C, Max Power Dissipation=100mW, Min Operating Temperature=-55°C, Part Number=AF0603FR-07130RL, Supplier Part Number 1=603-AF0603JR-07220RL, Temperature Coefficient=100ppm/°C, Tolerance=5%, ComponentLink1Description=http://www.yageo.com/documents/recent/PYu-AF_51_RoHS_L_5.pdf?src-supplier=Digi-Key, ComponentLink1URL=http://www.yageo.com/documents/recent/PYu-AF_51_RoHS_L_5.pdf?src-supplier=Digi-Key, Composition="Thick Film", Features="Moisture Resistant", Height=0.022inch, Lead Free="Lead Free", Length=0.063inch, Manufacturer 1=Yageo, Number of Terminations=2, Packaging="Tape and Reel", Pricing 1="1=0,12000, 10=0,02700, 50=0,02700, 100=0,00900, 1000=0,00800, 10000=0,00500 (USD)", Resistance=220R, RoHS=Yes, Stock 1=9358, Supplier 1=Mouser, Width=0.031inch
R8 R9 R10 R16 R17 R18 R19 R20: library part CMP-1011-00623-1, "10K 0.063W 1% 0402 (1005 Metric)  SMD", Case-EIA=0402, Case-Metric=1005, Case/Package=Molded, Manufacturer=Vishay, Manufacturer Part Number=ERJ-2RKF1002X, Max Operating Temperature=155°C, Min Operating Temperature=-55°C, Power="0.063 W", Power Rating=62.5mW, Resistance=10kR, Supplier Part Number 1=71-CRCW040210K0FKEDC, Temperature Coefficient=100ppm/°C, Tolerance="1 %", Composition="Thick Film", Contact Plating=Tin, Lead Free="Lead Free", Length=1mm, Mount="Surface Mount", Pricing 1="1=0.13, 10=0.051, 50=0.051, 100=0.029, 1000=0.029, 10000=0.005 (USD)", Stock 1=1778155, Supplier 1=Mouser, Technology=SMT, Termination=Wraparound
R11 R12 R13 R14 R15: library part CMP-1011-00708-1, "56K 0.063W 1% 0402 (1005 Metric)  SMD", Case-EIA=0402, Case-Metric=1005, Manufacturer=Bourns, Manufacturer Part Number=CR0402-FX-5602GLF, Max Operating Temperature=125°C, Max Power Dissipation=63mW, Min Operating Temperature=-55°C, Package Quantity=1, Power="0.063 W", Power Rating=62.5mW, Resistance=56kR, Supplier Part Number 1=652-CR0402FX-5602GLF, Temperature Coefficient=100ppm/°C, Tolerance="1 %", Voltage Rating=50V, Case/Package=0402, Case Code (Imperial)=0402, Case Code (Metric)=1005, ComponentLink1Description=https://www.bourns.com/docs/Product-Datasheets/CR0402.pdf?src-supplier=Digi-Key, ComponentLink1URL=https://www.bourns.com/docs/Product-Datasheets/CR0402.pdf?src-supplier=Digi-Key, ComponentLink2Description=http://www.bourns.com/pdfs/CR0402.pdf?src-supplier=Avnet, ComponentLink2URL=http://www.bourns.com/pdfs/CR0402.pdf?src-supplier=Avnet, Composition="Thick Film", Contact Plating=Tin, Depth=0.5mm, Height=0.016inch, Length=1mm, Military Standard=Not, Mount="Surface Mount", Number of Terminations=2, Packaging="Tape and Reel", Pricing 1="1=0.1, 10=0.022, 50=0.022, 100=0.013, 1000=0.008, 10000=0.005 (USD)", Radiation Hardening=No, Stock 1=37564, Supplier 1=Mouser, Technology=SMT, Termination=SMD/SMT, Thickness=356um, Width=0.5mm
U1: "Integrated Circuit", Manufacturer_Name=STMicroelectronics, Mouser Part Number=511-LD1117S33C, RS Part Number=1657750, Allied_Number=70390200, Allied Price/Stock=http://www.alliedelec.com/stmicroelectronics-ld1117s33ctr/70390200/, Datasheet Link=http://www.st.com/st-web-ui/static/active/en/resource/technical/document/datasheet/CD00000544.pdf, Height=1.9mm, Manufacturer_Part_Number=LD1117S33CTR, Mouser Price/Stock=https://www.mouser.com/Search/Refine.aspx?Keyword=511-LD1117S33C, RS Price/Stock=http://uk.rs-online.com/web/p/products/1657750
U2: library part AS7805ADTR-G1, "Integrated Circuit", Case/Package=TO-252-3, Dropout Voltage=2V, Manufacturer=Diodes, Manufacturer_Name="Diodes Inc.", Max Operating Temperature=125°C, Min Operating Temperature=-40°C, Mouser Part Number=621-AS7805ADTR-G1, Output Current=1A, Output Voltage=15V, Supplier Part Number 1=621-AS7815ADTR-G1, Datasheet Link=https://www.diodes.com/assets/Datasheets/AS78XXA.pdf, Height=2mm, Manufacturer_Part_Number=AS7805ADTR-G1, Manufacturer Part Number=AS7815ADTR-G1, Mount="Surface Mount", Mouser Price/Stock=https://www.mouser.com/Search/Refine.aspx?Keyword=621-AS7805ADTR-G1, Number of Regulators=1, Packaging="Tape and Reel", Pricing 1="1=0.43, 10=0.354, 50=0.354, 100=0.216, 1000=0.167, 10000=0.142 (USD)", Stock 1=1565, Supplier 1=Mouser
U4: library part CMP-1633-00148-1, "8-Line To 1-Line Data Selectors/Multiplexers, D0016A, LARGE T&R", F @ Nom Voltage(Max)(Mhz)=35, Generic Part Number=SN74LS151, ICC @ Nom Voltage(Max)(mA)=10, Manufacturer="Texas Instruments", Operating Temperature Range(C)="0 to 70", Rating=Catalog, tpd @ Nom Voltage(Max)(ns)=38, Voltage(Nom)(V)=5, Bits(#)=16, Channels(#)=1, Code_JEDEC="MS-012 variation AC", ComponentLink1Description="Manufacturer URL", ComponentLink1URL=http://www.ti.com/, ComponentLink2Description=Datasheet, ComponentLink2URL=http://www.ti.com/lit/ds/symlink/sn74ls151.pdf, ComponentLink3Description="Package Specification", ComponentLink3URL=http://www.ti.com/lit/ml/mpds178g/mpds178g.pdf, Configuration="\"16\",\"1\"", DatasheetVersion=SDLS054, Function=Encoder/Multiplexer, Input Type=TTL, Output Drive (IOL/IOH)(Max)(mA)=8/-0.4, Output Type=TTL, PackageReference=D0016A, PartNumber=SN74LS151DR, Schmitt Trigger=No, Technology Family=LS, Type=Standard, VCC(Max)(V)=5.25, VCC(Min)(V)=4.75
U5: library part ESP01, "ESP-01", DeviceSetName=ESP01, GateName_1=G$1, LibraryName=esp8266modules, Package=ESP01, SymbolName_1=ESP01
U6: library part CMP-2100-03657-1, "9-axis MotionTracking device, 2.4 to 3,6 V, -40 to 85 degC, 24-Pin QFN, RoHS, Tape and Reel", Case/Package=QFN, Manufacturer=InvenSense, Max Operating Temperature=85degC, Max Supply Voltage=3.6V, Min Operating Temperature=-40degC, Min Supply Voltage=2.4V, Package Description="24-Pin Quad Flat No-lead Package, Body 3 x 3 mm, Pitch 0.4 mm", Package Quantity=1, Package Reference=QFN-24, Datasheet URL=http://datasheet.octopart.com/MPU-9250-InvenSense-datasheet-21859386.pdf, Datasheet Version="Rev. 1.0, 01/2014", Height=1mm, Length=3.1mm, Manufacturer URL=http://www.invensense.com/, Mount=SurfaceMount, RoHSCompliant=true, Width=3.1mm
U7: library part CMP-0069-00282-2, "SIMPLE SWITCHER® Power Converter 150 KHz 3A Step-Down Voltage Regulator, 5-pin TO-263", Manufacturer="Texas Instruments", PackageTopMarking="NSUZXYTTE#*LM2596S*-5.0 P+", PowerWise=N, Code_JEDEC=MO-169-AB, ComponentLink1Description="LM2596 Datasheet", ComponentLink1URL=http://www.national.com/ds/LM/LM2596.pdf, ComponentLink2Description="LM2596 Web Page", ComponentLink2URL=http://www.national.com/pf/LM/LM2596.html, ComponentLink3Description="TS5B Package Page", ComponentLink3URL=http://www.national.com/packaging/folders/ts5b.html, CompType=Switcher, DatasheetVersion=May-2002, PackageDescription="TO-263, Molded, .400 x .390 x .180in, 5 Lead, .067in Pitch, Surface Mount", PackageReference=TS5B, PinCount=5, RevisionNote="Component URLs added", RoHS=N
U8: "Integrated Circuit", Manufacturer_Name="Diodes Inc.", Mouser Part Number=621-AS7805ADTR-G1, Datasheet Link=https://www.diodes.com/assets/Datasheets/AS78XXA.pdf, Height=2mm, Manufacturer_Part_Number=AS7805ADTR-G1, Mouser Price/Stock=https://www.mouser.com/Search/Refine.aspx?Keyword=621-AS7805ADTR-G1

## Via types
v1: diameter 50, hole 25.29, Top Layer to Bottom Layer, 56 vias
v2: diameter 50, hole 28, Top Layer to Bottom Layer, 14 vias
v3: diameter 31.48, hole 15.74, Top Layer to Bottom Layer, 6 vias
v4: diameter 31.48, hole 14.74, Top Layer to Bottom Layer, 1 vias

## Nets (pads, with @x,y where several pads share a name; then routed paths per layer and width w, separated by ;. In a path a pad name is that pad's centre, name@x,y a point inside that pad or via, vN(x,y) a via of type N, cw(c..) or ccw(c..) an arc to the next point about the centre after c; other vN are vias at no path point)
0: "M DIR.6" "M ESQ.6" C1.1 C2.1 C3.1 C4.1 C5.1 C6.1 C7.1 C8.1 C9.1 C10.2 C11.1 C12.1 C13.1 C14.2 C15.1 C16.1 C17.1 C18.1 D1.2 DS1.2 DS2.2 DS3.2 ENCODER.7 ESC.6 ESC.7 P1.1 R16.1 R17.1 R18.1 R19.1 R20.1 RECEPTOR.2 U1.1 U2.2 U3.19 U3.20 U3.22 U4.7 U4.8 U5.GND U6.11 U6.18 U6.20 U7.3 U7.5 U8.2 | length 33.3
  Top Layer w25.29: C16.1 1155,531.17 C16.1@1156.53,529.65 ; C15.1@1228.27,529.65 C15.1 C15.1@1234.44,532.35 ; C17.1@1323.47,532.35 C17.1@1325,533.88 ; C17.1 C17.1@1325,533.88 ; C17.1@1326.53,532.35 C17.1@1325,533.88 ; C18.1@1394.1,532.35 C18.1 C18.1@1398.03,526.46 ; C6.1 C6.1 ; C5.1@1674.96,526.42 C5.1 ; C8.1 C8.1@1807.51,528.97 ; C7.1@1878.47,528.97 1880,530.5 C7.1
  other v2: 1445,230 2635,1335 335,2100
3V3: "M DIR.2" "M ESQ.2" C1.2 C2.2 C10.1 C12.2 R7.2 U1.2 U5.CH_PD U5.RST U5.VCC U6.1 U6.8 U6.13 | length 8996.7
  Top Layer w7: U6.1 1429.61,1489.37 1423.51,1495.47 1354.77,1495.47 C10.1 1345,1502.32 v3(1345,1425) 1350.5,1419.5 1350.5,1389.5 1385,1355 1456.2,1355 1476.21,1375.01 1476.21,1389.52 U6.8 ; U6.13 1560.48,1410.8 1654.42,1410.8 C12.2 1663.94,1416.38 1670.67,1409.64 1670.67,1405.7 1690,1386.38 v3(1690,1330)
  Top Layer w15.74: v1(55,420) 55,110 115,50 1145,50 ; R7.2 1137.4,104.88 1276.58,244.06 ; 1276.58,336.26 1276.58,244.06 ; v1(1915,50) 1145,50 ; v1(1915,235) 1915.79,235.79 1915.79,340.47 1916.58,341.26 ; 1145,50 1276.58,181.58 1276.58,244.06
  Top Layer w25.29: v1(55,1245) 55,1320 ; v1(185,2155) 56.46,2026.46 C2.2 56.42,1579.96 C1.2 C1.2 55,1498.62 55,1320 ; U1.2 315,1275 285.48,1245.48 129.52,1245.48 55,1320 ; v1(455,2420) 455,2430 650,2625 650,2900 700,2950 U5.CH_PD U5.RST U5.VCC
  Bottom Layer w7: v1(55,1245) 687.92,1245 703.42,1260.5 1365.5,1260.5 ; v3(1345,1425) 1345,1281 1365.5,1260.5 ; v3(1690,1330) 1620.5,1260.5 1365.5,1260.5
  Bottom Layer w15.74: v1(55,420) v1(55,1245) ; v1(1915,50) v1(1915,235)
  Bottom Layer w25.29: v1(185,2155) 187.5,2155 452.5,2420 v1(455,2420)
5V: C9.2 C14.1 C17.2 C18.2 ENCODER.1 ENCODER.4 ESC.3 L1.2 R2.1 R6.2 RECEPTOR.1 U3.23 U4.16 U7.4 U8.3 | length 10033.1
  Top Layer w15.74: v1(346.14,1972.05) 346.14,2016.14 378.46,2048.46 ESC.3 428.46,2049.23 504.23,2049.23 v1(505,2050) ; C14.1 925.12,825.12 1059.69,959.69 R6.2 ; v1(825,1325) 969.05,1325 979.06,1335 L1.2@1020,1294.06 ; v1(1014.51,3015.49) 1017.07,3015.49 1098.13,2934.43 C9.2 1098.13,2929.53 1100.5,2927.16 1216.78,2927.16 1219.51,2924.43 U4.16 ; v1(1374.51,3210.49) 1485.49,3099.51 1485.49,3031.05 RECEPTOR.1 ; U8.3 1400.55,766.85 1483.52,849.82 1483.52,1198.52 1550,1265 v1(1930,1265) ; v1(2465,1245) 2465,1250 2491.54,1276.54 ; ENCODER.1 2508.15,1293.15 2491.54,1276.54 ; ENCODER.4 2655.79,1692.91 U3.23@2700.58,1737.7 ; U3.23 2700.58,1749.42 U3.23@2700.58,1737.7 ; 2491.54,1276.54 2805,1276.54 2848.46,1320 2849.21,1320 2849.21,1505.79 2700,1655 2700.58,1655.58 U3.23@2700.58,1737.7
  Top Layer w25.29: U7.4 345.94,640.01 345.94,559.06 400,505 440,505 755,820 810,820 820,810 C14.1 820,874.33 844.76,899.09 919.09,899.09 1020,1000 1020,1294.06 L1.2 1020.95,1369.06 R2.1 905,1630 v1(1310,1225) ; v1(1315,745) 1398.39,745 U8.3 1400.55,727.48 1400.28,727.21 1400.28,655.51 ; C17.2 1325,635 1345.51,655.51 1400.28,655.51 ; C18.2 1400.28,583.82 1400.28,655.51
  Bottom Layer w15.74: v1(346.14,1972.05) 346.14,1808.86 825,1330 v1(825,1325) ; v1(505,2050) 1014.51,2559.51 v1(1014.51,3015.49) 1014.51,3165.49 1059.51,3210.49 v1(1374.51,3210.49) ; v1(1930,1265) 2430,1265 2450,1245 v1(2465,1245)
  Bottom Layer w25.29: v1(1315,745) v1@1315,1220
15V: "M DIR.4" "M ESQ.4" C7.2 C8.2 U2.3 | length 1553.6
  Top Layer w10: 1355,335.95 1355.32,336.26
  Top Layer w15.74: 1355,335.95 1355,210 1425,140 1920,140 1995.32,215.32 1995.32,341.26 1995.32,519.68 1936.38,578.62 C7.2 1880,620 1854.45,645.55 1820.55,645.55 ; C8.2 1805,630 1820.55,645.55 ; U2.3 1820.55,645.55
ARMA: ESC.2 U3.27 | length 2022.7
  Top Layer w15.74: ESC.2 1512.32,2097.68 1559.45,2050.56 2009.45,2050.56 2301.15,1758.85 U3.27
BAT1S: R15.1 R20.2 U3.5 | length 187.7
  Top Layer w15.74: R20.2 1400.18,2267.9 1400.18,2349.82 U3.5 R15.1
BAT2S: R1.1 R14.1 R19.2 U3.6 | length 1476.8
  Top Layer w15.74: R1.1 735,1775 v1(795,1835) ; v1(794,2207) 1429.76,2207 1489.49,2266.73 1499.01,2266.73 R19.2 1500.58,2268.29 1500.58,2349.42 U3.6 R14.1
  Bottom Layer w15.74: v1(794,2207) 795,2206 v1(795,1835)
BAT3S: R13.1 R18.2 U3.7 | length 189.7
  Top Layer w15.74: R13.1 U3.7 1603.08,2348.08 1603.08,2268.71 1604.06,2267.72 R18.2
BAT4S: R12.1 R17.2 U3.8 | length 188.1
  Top Layer w15.74: R17.2 1700.58,2268.29 1700.58,2349.42 U3.8 R12.1
BAT5S: R11.1 R16.2 U3.9 | length 189.7
  Top Layer w15.74: R11.1 U3.9 1803.08,2348.08 1803.08,2268.71 1804.06,2267.72 R16.2
BP3V3: R8.2 R9.1 R10.2 U3.21 | length 3798.2
  Top Layer w15.74: R8.2 337.72,2187.72 285,2135 285,1894.22 294.22,1885 295,1885 395,1785 470.75,1785 578.03,1892.28 R10.2 R10.2@581.97,1892.28 ; R9.1 580.99,1996.3 688.7,1996.3 v2(695,1990) ; v2(695,1845) 629.25,1845 R10.2@581.97,1892.28 ; v2(1720,1900) 1710.73,1900 1703.01,1892.28 R10.2@581.97,1892.28 ; v1(2215,1950) v1(2410,1950)
  Bottom Layer w15.74: v2(695,1845) v2(695,1990) ; v2(1720,1900) 2165,1900 v1(2215,1950) ; v1(2410,1950) 2765,1950 2901.15,1813.85 U3.21
"ENCODER D+": ENCODER.3 U3.29 | length 754.9
  Top Layer w15.74: U3.29 2236.52,1614.63 v1(2420.37,1614.63) ; v1(2605,1625) 2606.58,1623.43 ENCODER.3
  Bottom Layer w15.74: v1(2420.37,1614.63) 2594.63,1614.63 v1(2605,1625)
"ENCODER D-": ENCODER.2 U3.28 | length 573.2
  Top Layer w15.74: U3.28 2281.15,1670 2470,1670 2557.36,1582.64 ENCODER.2
"ENCODER E+": ENCODER.6 U3.31 | length 1065.2
  Top Layer w15.74: U3.31 1912.03,1750 2177.03,1485 v1(2420,1485) ; ENCODER.6 2752.11,1437.11 2752.11,1517.11 v1(2755,1520)
  Bottom Layer w15.74: v1(2420,1485) 2720,1485 v1(2755,1520)
"ENCODER E-": ENCODER.5 U3.30 | length 952.4
  Top Layer w15.74: U3.30 2211.15,1540 v1(2465,1540) ; ENCODER.5 v1(2705,1580)
  Bottom Layer w15.74: v1(2465,1540) 2665,1540 v1(2705,1580)
INAD: "M DIR.1" U3.14 | length 3108.5
  Top Layer w15: 1237.2,336.26 1237.2,361.85
  Top Layer w15.74: 1237.2,336.26 1241.15,340.2 1241.15,375.32 1270.83,405 1380,405 1485,510 1485,615 1509.26,639.26 1509.26,799.26 v1(1510,800) ; v1(2085,810) 2087.5,812.5 2087.5,1407.5 v1(2090,1410) ; v1(2250,2110) 2420,2110 2455,2145 2455,2196.15 U3.14
  Bottom Layer w15.74: v1(1510,800) 1515,805 2080,805 v1(2085,810) ; v1(2090,1410) 2253.75,1573.75 2253.75,1773.33 2257.87,1777.45 2257.87,2092.86 2250,2100.73 v1(2250,2110)
INAE: "M ESQ.1" U3.13 | length 2389.9
  Top Layer w15.74: v1(1875,430) 1875,343.47 1877.21,341.26 ; U3.13 U3.13@2203.08,2350 ; v1(2280,640) v1(2280,1310)
  Bottom Layer w15.74: v1(1875,430) 2070,430 v1(2280,640) ; U3.13 2352.5,2198.65 2352.5,1972.5 2353.75,1971.25 2353.75,1538.13 2276.88,1461.25 2276.88,1313.12 v1(2280,1310)
INT: U3.4 U6.12 | length 1281.2
  Top Layer w7: U3.4@1300,2348.85 U3.4 ; v3(1450,1825) 1450,1735 v3(1620,1565) ; U6.12 1609.06,1320 v4(1625,1320)
  Bottom Layer w7: U3.4 1300,2348.85 1300,1975 v3(1450,1825) ; v3(1620,1565) 1625,1560 v4(1625,1320)
MOTOR_D+: "M DIR.5" U3.34 | length 2027.5
  Top Layer w15.74: 1394.69,336.26 1394.69,387.53 1512.48,505.33 1512.48,597.48 1552.87,637.87 1552.87,1157.87 1620,1225 v1(1835,1225) ; U3.34 1706.15,1645 1850,1645 1985,1510 v1(1985,1385)
  Bottom Layer w15.74: v1(1835,1225) 1835,1230 1985,1380 v1(1985,1385)
MOTOR_D-: "M DIR.3" U3.33 | length 2961.6
  Top Layer w15.74: 1315.95,336.26 1315.95,204.05 1420,100 v1(2160,100) ; U3.33 1761.15,1690 1935.63,1690 2150,1475.63 v1(2150,440)
  Bottom Layer w15.74: v1(2150,440) 2155.64,434.36 2155.64,104.36 v1(2160,100)
MOTOR_E+: "M ESQ.5" U3.36 | length 1914.6
  Top Layer w15.74: U3.36@1400.18,1749.82 U3.36 ; v1(1920,1645) 2034.69,1530.32 2034.69,341.26
  Bottom Layer w15.74: U3.36 1505.36,1645 v1(1920,1645)
MOTOR_E-: "M ESQ.3" U3.35 | length 1626.3
  Top Layer w15.74: U3.35 1501.38,1750 1985,1266.39 v1(1985,620) ; v1(1950,475) 1955.95,469.05 1955.95,341.26
  Bottom Layer w15.74: v1(1950,475) 1985,510 v1(1985,620)
MUX_RX: U3.26 U4.5 | length 2370.5
  Top Layer w15.74: U4.5 1419.76,2717.39 1419.76,2789.76 v1(1420,2790) ; U3.26 2648.55,1997.4 2648.55,2577.18 2635,2590.73 v1(2635,2600)
  Bottom Layer w15.74: v1(1420,2790) 1422.13,2792.13 1600.57,2792.13 1636.31,2827.87 1692.76,2827.87 1725.18,2795.45 1725.18,2771.04 1843.34,2652.87 2481.5,2652.87 2534.37,2600 v1(2635,2600)
NetC3_2: C3.2 C4.2 R2.2 R4.2 U1.3 | length 1035
  Top Layer w15.74: 470,1334.6 470,1612.4 555.63,1698.03 R4.2
  Top Layer w25.29: C4.2@405.55,1266.53 405.55,1340.65 411.61,1334.6 470,1334.6 513.94,1334.6 C3.2 520,1525 625,1630 R2.2
NetC11_2: C11.2 U6.10 | length 342.3
  Top Layer w7: C11.2 1345,1310 1485,1310 1507.87,1332.87 U6.10
NetC13_2: C13.2 C15.2 C16.2 R1.2 R3.2 R4.1 U7.1 U8.1 | length 3060.6
  Top Layer w15.74: R3.2 542.5,467.19 v1(542.5,532.5) ; R1.2 595.16,1774.84 595.16,1700.16 R4.1 v1(670,1700) ; v1(750,1120) v1(750,1500)
  Top Layer w25.29: U7.1 139.48,645.68 139.48,507.02 C13.2 141.5,501.16 143.51,499.14 147.35,499.14 206.5,440 455,440 479.69,464.69 R3.2 559.69,464.69 755,660 1074.5,660 C16.2@1155,579.5 ; C16.2@1156.53,581.03 1226.03,581.03 C15.2 1224.72,590.28 1224.72,741.89 U8.1
  Bottom Layer w15.74: v1(542.5,532.5) 750,740 v1(750,1120) ; v1(670,1700) 670,1580 v1(750,1500)
NetD1_1: D1.1 L1.1 U7.2 | length 1463.3
  Top Layer w25.29: U7.2 203.07,538.62 225,516.69 v1(225,510) ; v1(545,980) D1.1 735.63,986.1 639.06,1082.68 L1.1 L1.1@680,1254.06
  Bottom Layer w25.29: v1(225,510) 210,525 210,810 380,980 v1(545,980)
NetDS1_1: DS1.1 R5.1 | length 69.1
  Top Layer w15: R5.1 DS1.1
NetDS2_1: DS2.1 R6.1 | length 71.8
  Top Layer w25.29: DS2.1 R6.1
NetDS3_1: DS3.1 R7.1 | length 81.5
  Top Layer w15.74: R7.1 985,217.68 DS3.1
NetJ5_3: RECEPTOR.3 U4.12 | length 109.9
  Top Layer w15.74: RECEPTOR.3 1412.51,3025.29 1412.51,2968.22 1418.38,2962.35 1418.38,2924.97 U4.12
NetJ5_4: RECEPTOR.4 U4.13 | length 105.5
  Top Layer w15.74: RECEPTOR.4 1369.35,3029.07 1369.35,2923.99 U4.13
NetJ5_5: RECEPTOR.5 U4.14 | length 109.7
  Top Layer w15.74: U4.14 1320.14,2924.46 1320.14,2993.95 1329.83,3003.64 RECEPTOR.5
NetJ5_6: RECEPTOR.6 U4.15 | length 114.1
  Top Layer w15.74: U4.15 1270.64,2924.97 1270.64,2956.62 1286.52,2972.49 1286.52,3025.29 RECEPTOR.6
NetJ5_7: RECEPTOR.7 U4.1 | length 1223.8
  Top Layer w15.74: U4.1@1219.51,2730.92 U4.1 1047.86,2717.14 929.51,2835.49 929.51,3150.49 1049.51,3270.49 1154.51,3270.49 1251.09,3173.91 RECEPTOR.7
NetJ5_8: RECEPTOR.8 U4.2 | length 1108.2
  Top Layer w15.74: RECEPTOR.8 1211.87,3029.38 1211.87,3160.65 1142.03,3230.49 1134.51,3230.49 1132.71,3232.29 1047.71,3232.29 959.51,3144.09 959.51,2865.49 1064.51,2760.49 1239.94,2760.49 1269.51,2730.92 U4.2
NetJ6_1: "DIV BAT.1" R11.2 | length 498.9
  Top Layer w15.74: R11.2 1943.85,2494.69 2148.85,2699.68 2148.85,2734.8 2152.8,2738.74 2152.8,2713.15
NetJ6_2: "DIV BAT.2" R12.2 | length 533.9
  Top Layer w15.74: R12.2 1703.12,2494.69 1766.96,2558.52 1968.32,2558.52 2109.48,2699.68 2109.48,2734.8 2113.43,2738.74
NetJ6_3: "DIV BAT.3" R13.2 | length 594.6
  Top Layer w15.74: R13.2 1603.12,2494.69 1692.7,2584.26 1954.69,2584.26 2070.11,2699.68 2070.11,2734.8 2074.06,2738.74
NetJ6_4: "DIV BAT.4" R14.2 | length 673.6
  Top Layer w15.74: R14.2 1504.12,2497.64 1504.12,2529.12 1585,2610 1941.06,2610 2030.74,2699.68 2030.74,2734.8 2034.69,2738.74
NetJ6_5: "DIV BAT.5" R15.2 | length 716.6
  Top Layer w15.74: R15.2 1402.33,2494.69 1557.65,2650 1941.69,2650 1991.37,2699.68 1991.37,2734.8 1995.32,2738.74
SMUX0: U3.25 U4.9 | length 2287.9
  Top Layer w15.74: U4.9 1626.89,2923.84 1650.73,2900 v1(1660,2900) ; U3.25 2680,1928.85 2680,2080 2750,2150 2750,2595 2645,2700 v1(2645,2715)
  Bottom Layer w15.74: v1(1660,2900) 1666.56,2893.45 1699.99,2893.45 1776.66,2816.78 1776.66,2792.36 1854.02,2715 v1(2645,2715)
SMUX1: U3.24 U4.10 | length 2478.7